# Altium PCB PCB1.PcbDoc (part 5 of 7)
Units mm, origin at the board's own origin, x right, y up, seen from the top; angles counter-clockwise.
Board outline 100 x 70 mm, 6 copper layers (Top Layer 1, GND_1, SIG, VCC, GND_2, Bottom Layer 1), stack 0.816 mm thick; 462 components, 328 nets, 2208 pads, 873 vias.
Unrouted connection lines stored in the file: 175.
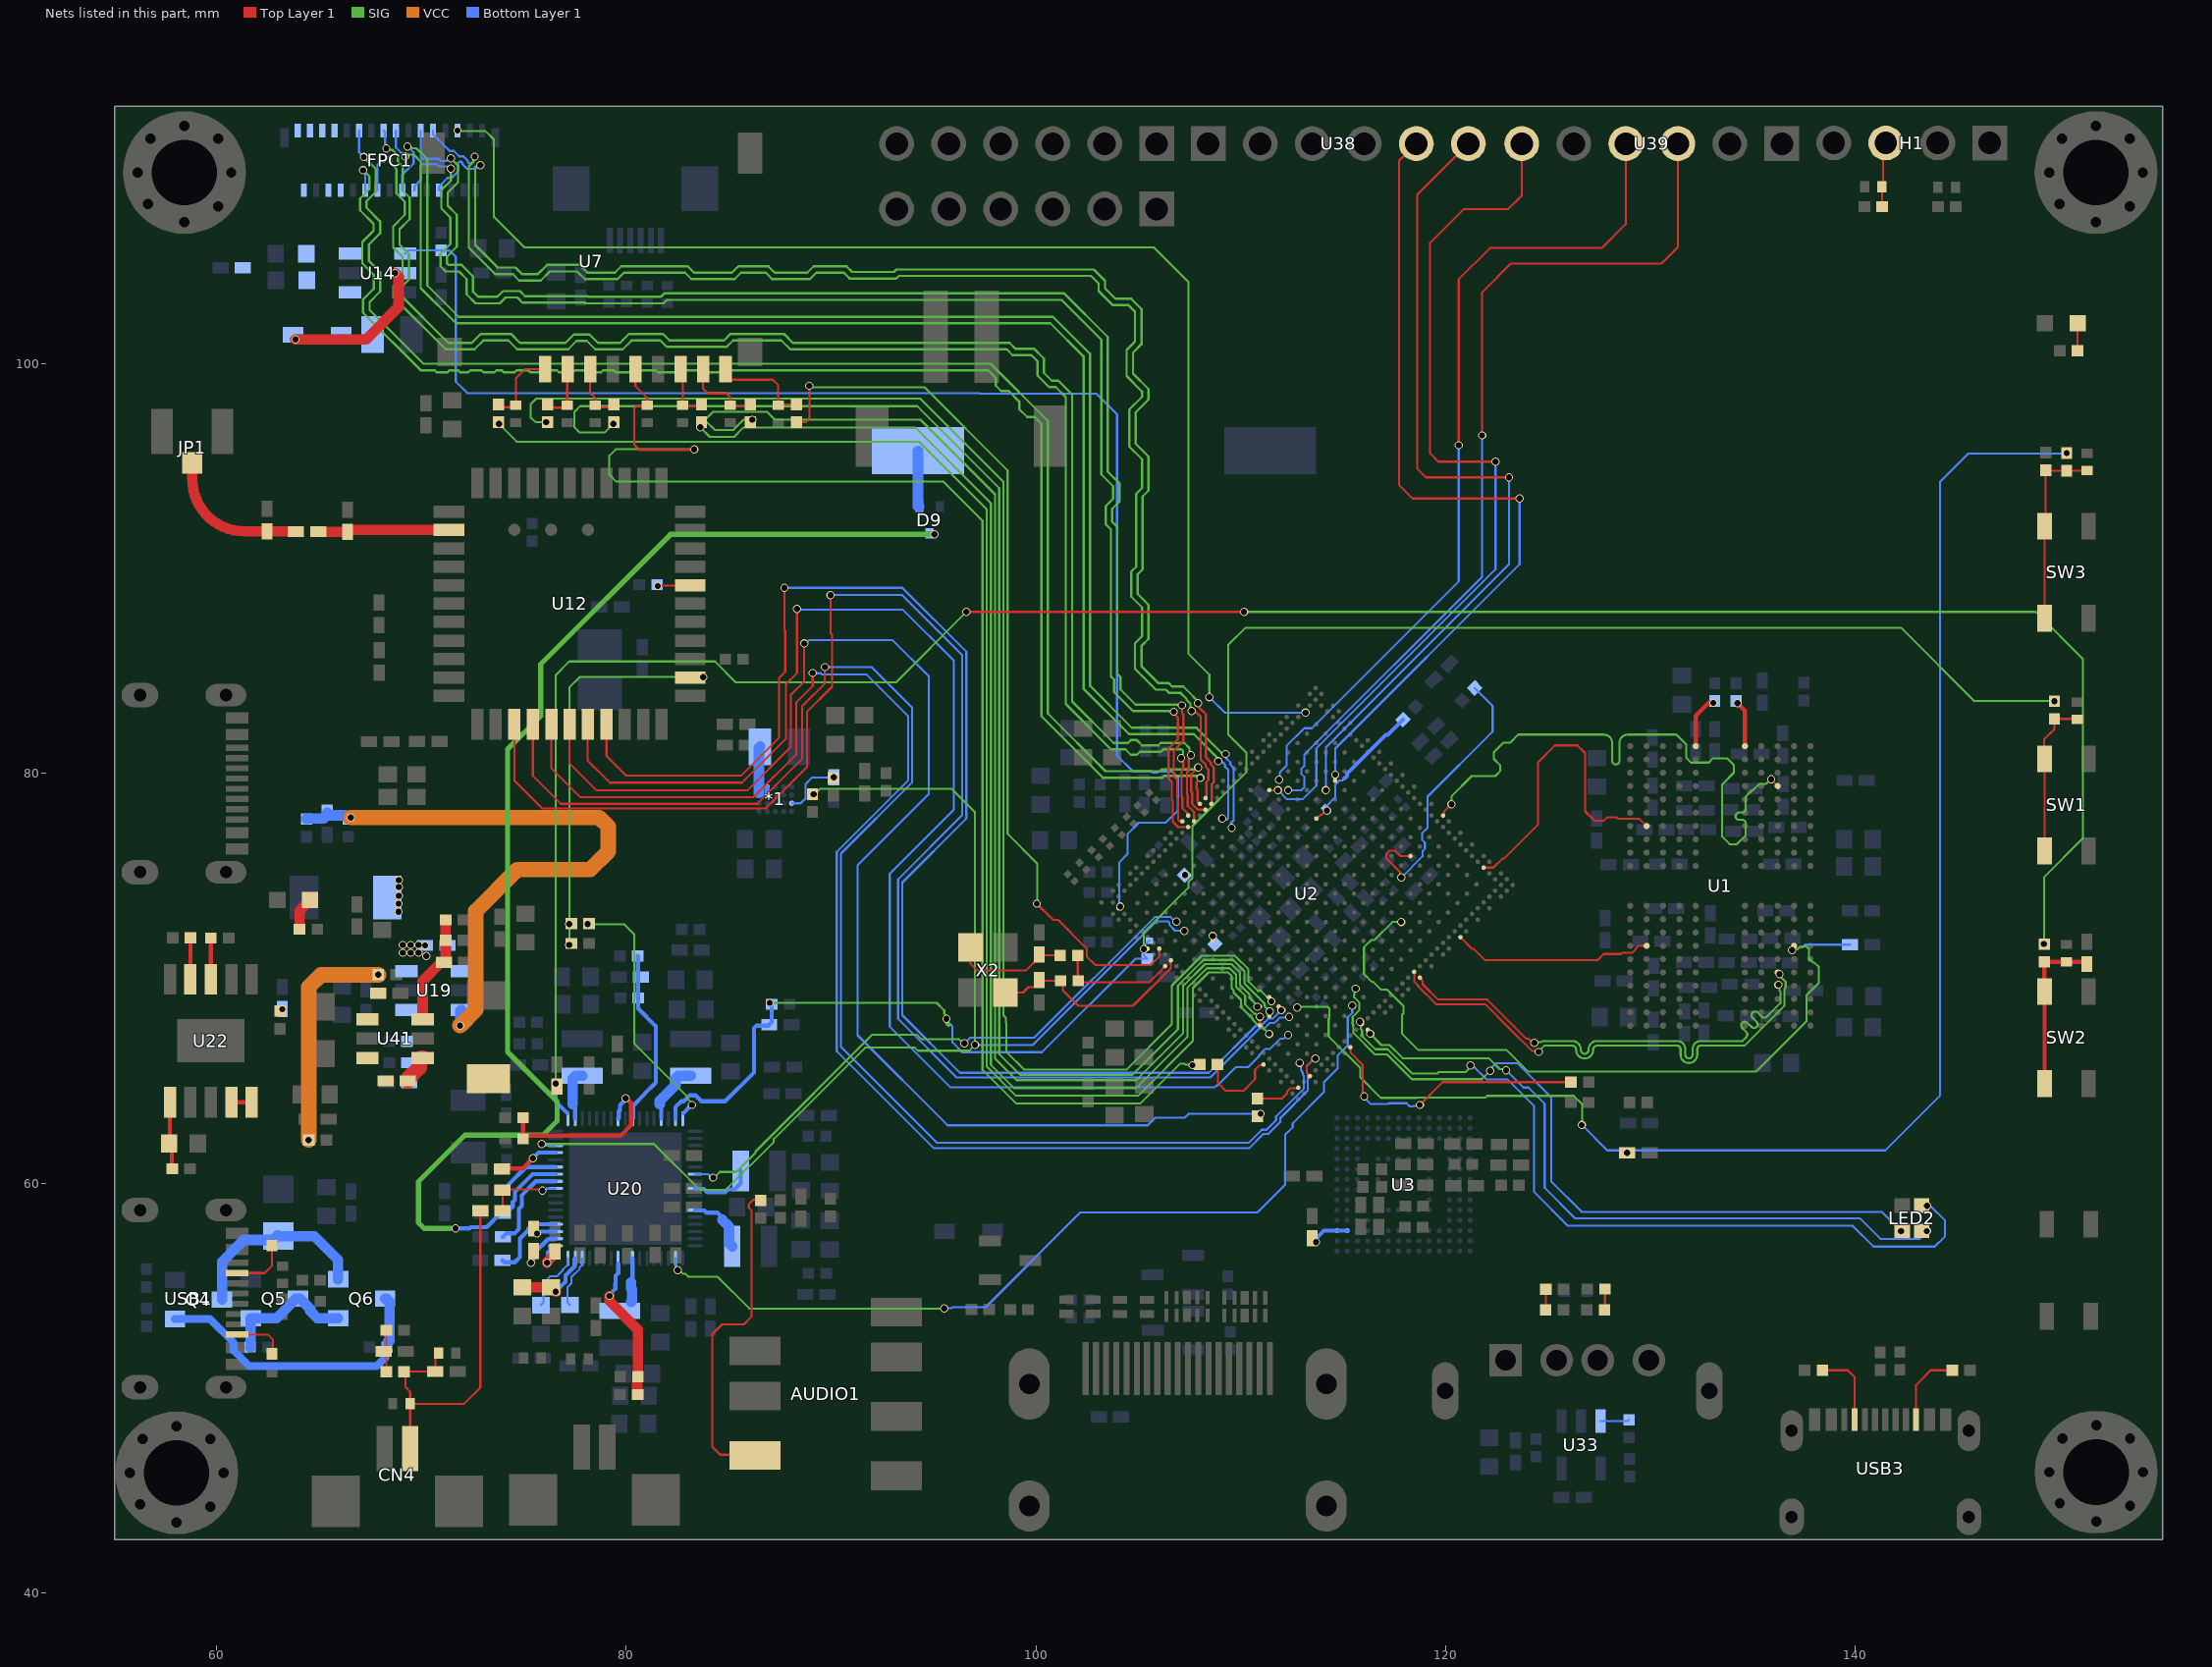
[diagram p9: the nets of this part, all layers, seen from the top]

## Via types
v1: diameter 0.4, hole 0.3, Top Layer 1 to Bottom Layer 1, tented both sides, 873 vias

## Nets (pads, with @x,y where several pads share a name; then routed paths per layer and width w, separated by ;. In a path a pad name is that pad's centre, name@x,y a point inside that pad or via, vN(x,y) a via of type N, cw(c..) or ccw(c..) an arc to the next point about the centre after c; other vN are vias at no path point) (continued)
LPDDR4_DQS1_A_P: U1.D10 U2.N1 | length 30.6
  Top Layer 1 w0.102: U2.N1@119.887,77.948 119.887,77.985 119.946,78.044 119.946,78.154 v1(120.295,78.503) ; v1(135.902,79.72) 135.902,79.714 136.224,79.392 U1.D10@136.224,79.387
  SIG w0.102: v1(120.295,78.503) 120.295,78.885 121.282,79.873 122.434,79.873 122.682,80.121 122.682,80.391 122.361,80.712 122.361,81.041 122.829,81.509 123.165,81.509 123.555,81.899 123.649,81.899 126.987,81.899 127.737,81.899 cw(c127.737,81.492) 128.143,81.492 128.143,80.62 ccw(c128.321,80.62) 128.321,80.442 ccw(c128.321,80.62) 128.499,80.62 128.499,81.492 cw(c128.905,81.492) 128.905,81.899 131.232,81.899 131.277,81.899 131.35,81.825 131.756,81.42 131.756,80.772 131.991,80.537 132.861,80.537 133.071,80.747 133.747,80.747 134.087,80.407 134.087,80.042 133.512,79.467 133.512,76.914 133.877,76.549 134.227,76.549 134.666,76.988 134.666,77.509 134.666,77.559 ccw(c134.488,77.559) 134.488,77.737 134.342,77.737 cw(c134.342,77.915) 134.342,78.093 134.488,78.093 ccw(c134.488,78.271) 134.666,78.271 134.666,78.772 134.666,78.877 134.97,79.181 135.008,79.181 135.312,79.485 135.638,79.485 135.873,79.72 v1(135.902,79.72)
LPDDR4_DQS1_B_N: U1.V10 U2.B17 | length 24.6
  Top Layer 1 w0.102: U2.B17@118.472,70.311 118.472,69.838 118.655,69.655 118.655,69.617 119.539,68.732 121.949,68.732 123.107,67.575 124.222,66.459 124.501,66.459 v1(124.558,66.402)
  SIG w0.102: v1(124.558,66.402) 124.558,66.446 124.823,66.711 125.412,66.711 126.187,66.711 cw(c126.187,66.52) 126.378,66.52 126.378,66.504 ccw(c126.797,66.504) 127.216,66.504 127.216,66.52 cw(c127.406,66.52) 127.406,66.711 128.634,66.711 128.847,66.711 130.556,66.711 131.305,66.711 cw(c131.305,66.533) 131.483,66.533 131.483,66.269 ccw(c131.89,66.269) 131.89,65.862 ccw(c131.89,66.269) 132.296,66.269 132.296,66.533 cw(c132.474,66.533) 132.474,66.711 132.969,66.711 134.123,66.711 134.594,66.711 136.56,68.676 136.56,69.488 136.612,69.54 136.612,69.832 136.313,70.132 v1(136.313,70.207)
LPDDR4_DQS1_B_P: U1.W10 U2.A17 | length 24.7
  Top Layer 1 w0.102: U2.A17@118.755,70.028 118.755,69.996 118.884,69.868 118.884,69.711 119.634,68.961 122.044,68.961 123.335,67.669 123.959,67.046 124.061,67.046 124.255,66.852 v1(124.335,66.852) ; U1.W10@136.224,69.637 136.26,69.673 v1(136.26,69.686)
  SIG w0.102: v1(124.335,66.852) 124.372,66.889 124.688,66.889 124.739,66.94 125.318,66.94 125.412,66.94 126.187,66.94 cw(c126.187,66.52) 126.606,66.52 126.606,66.504 ccw(c126.797,66.504) 126.987,66.504 126.987,66.52 cw(c127.406,66.52) 127.406,66.94 128.634,66.94 128.847,66.94 130.556,66.94 131.305,66.94 cw(c131.305,66.533) 131.712,66.533 131.712,66.269 ccw(c131.89,66.269) 131.89,66.091 ccw(c131.89,66.269) 132.067,66.269 132.067,66.533 cw(c132.474,66.533) 132.474,66.94 132.969,66.94 134.509,66.94 134.656,67.087 134.692,67.123 ccw(c134.566,67.248) 134.692,67.374 134.487,67.579 cw(c134.613,67.704) 134.487,67.83 cw(c134.613,67.704) 134.739,67.83 134.943,67.625 ccw(c135.069,67.751) 135.195,67.625 ccw(c135.069,67.751) 135.195,67.877 134.997,68.075 cw(c135.123,68.2) 134.997,68.326 cw(c135.123,68.2) 135.248,68.326 135.446,68.128 ccw(c135.572,68.254) 135.697,68.128 136.02,68.45 136.357,68.788 136.357,69.361 136.317,69.401 136.317,69.629 v1(136.26,69.686)
LPDDR4_ODT0_CA_A: U1.G2 U2.E2 | length 15.6
  Top Layer 1 w0.102: U2.E2@121.866,75.402 122.334,75.402 122.774,75.842 122.858,75.842 124.523,77.507 124.523,80.548 125.349,81.374 126.454,81.374 126.823,81.005 126.823,78.152 127.274,77.701 127.738,77.701 127.895,77.858 128.36,77.858 128.433,77.784 129.476,77.784 U1.G2@129.824,77.437
LPDDR4_ODT0_CA_B: U1.T2 U2.A10 | length 9.8
  Top Layer 1 w0.102: U2.A10@120.735,72.008 120.735,72.006 121.308,71.433 121.388,71.433 121.942,70.879 127.419,70.879 127.727,71.187 128.558,71.187 128.61,71.239 129.104,71.239 129.451,71.587 U1.T2@129.824,71.587
LPDDR4_RESETN: C149.2 U1.T11 U2.1C7 | length 37
  SIG w0.102: v1(117.836,72.751) 117.41,72.751 116.528,71.869 116.373,71.869 116.019,71.515 116.019,70.214 116.406,69.827 116.473,69.827 116.861,69.44 117.159,69.44 117.944,68.654 117.944,68.277 117.885,68.218 117.885,67.281 118.663,66.503 122.981,66.503 124.047,65.437 135.16,65.437 137.63,67.907 137.63,69.168 138.228,69.766 138.228,70.554 138.022,70.761 137.951,70.761 137.753,70.958 137.753,71.425 137.62,71.558 137.473,71.558 137.445,71.53 137.3,71.53 137.204,71.434 136.98,71.434 v1(136.923,71.377)
  Bottom Layer 1 w0.102: v1(136.923,71.377) 136.98,71.434 137.204,71.434 137.296,71.526 137.441,71.526 137.558,71.642 C149.2@139.753,71.642
MIC1P: C116.2 C253.2 CN4.2 R124.1 U25.2 U26.2 | length 18.8
  Top Layer 1 w0.102: CN4.2@69.45,47.026 69.445,47.031 U26.2@69.445,49.222 ; U25.2@70.828,51.703 70.678,51.553 C253.2@70.678,50.798 69.157,50.798 R124.1@69.14,50.781 69.215,50.706 69.215,50.038 69.445,49.808 U26.2@69.445,49.222 ; C116.2@72.869,58.653 72.869,50.009 72.082,49.222 U26.2@69.445,49.222
MIPI_DSI_0_N: FPC1.21 U2.AR24 | length 70.6
  Top Layer 1 w0.109: v1(107.122,83.33) 107.136,83.316 107.136,82.966 107.201,82.9 107.201,81.572 106.737,81.108 106.737,79.861 106.902,79.696 106.902,78.803 106.945,78.76 106.945,77.753 107.01,77.688 107.134,77.688 U2.AR24@107.155,77.667
  SIG w0.112: v1(71.427,110.046) 71.431,110.046 71.785,109.692 71.785,108.869 71.279,108.363 71.279,107.728 71.72,107.287 71.72,105.727 71.248,105.254 71.248,104.901 71.313,104.836 71.963,104.836 72.517,104.282 72.517,103.531 72.771,103.277 73.686,103.277 73.97,103.561 74.806,103.561 75.055,103.312 78.108,103.312 78.144,103.277 81.687,103.277 81.855,103.445 101.383,103.445 103.51,101.318 103.51,94.737 104.088,94.159 104.088,93.293 103.728,92.933 103.728,92.298 103.978,92.047 103.978,84.871 104.135,84.714 104.135,84.105 104.878,83.362 106.335,83.362 106.344,83.371 107.081,83.371 v1(107.122,83.33)
  Bottom Layer 1 w0.109: FPC1.21@69.954,111.398 69.954,110.085 70.026,110.013 70.845,110.013 70.95,109.908 71.211,109.908 71.349,110.046 v1(71.427,110.046)
MIPI_DSI_0_P: FPC1.20 U2.AP24 | length 70.5
  Top Layer 1 w0.109: v1(106.733,83.014) 106.733,82.935 106.939,82.728 106.939,81.68 106.475,81.216 106.475,79.752 106.64,79.588 106.64,78.695 106.683,78.652 106.683,77.645 106.944,77.384 U2.AP24@107.438,77.384
  SIG w0.112: v1(71.427,109.544) 71.44,109.532 71.44,108.969 70.964,108.494 70.964,107.598 71.405,107.157 71.405,105.857 70.933,105.385 70.933,104.771 71.183,104.521 71.832,104.521 72.202,104.151 72.202,103.4 72.641,102.962 73.816,102.962 74.1,103.246 74.676,103.246 74.925,102.997 77.978,102.997 78.013,102.962 81.817,102.962 81.986,103.13 101.253,103.13 103.195,101.188 103.195,94.606 103.773,94.028 103.773,93.424 103.413,93.063 103.413,92.167 103.663,91.917 103.663,84.74 103.82,84.584 103.82,83.975 104.747,83.047 106.699,83.047 v1(106.733,83.014)
  Bottom Layer 1 w0.109: FPC1.20@69.654,108.492 69.654,108.667 69.962,108.974 69.962,109.688 70.026,109.752 70.736,109.752 70.842,109.646 71.247,109.646 71.349,109.544 v1(71.427,109.544)
MIPI_DSI_1_N: FPC1.15 U2.AP23 | length 71.5
  Top Layer 1 w0.109: v1(107.573,80.897) 107.573,80.818 107.46,80.704 107.46,80.128 107.374,80.042 107.374,78.999 107.417,78.956 107.417,78.427 107.721,78.124 U2.AP23@107.721,77.667
  SIG w0.112: v1(68.282,110.521) 68.337,110.466 68.472,110.466 68.491,110.447 68.589,110.447 68.839,110.197 68.839,109.903 69.088,109.654 69.088,108.458 69.42,108.126 69.42,107.074 68.93,106.584 68.93,105.822 69.386,105.366 69.386,104.12 68.93,103.663 68.93,103.409 71.308,101.031 72.456,101.031 72.893,101.468 74.364,101.468 74.801,101.031 77.028,101.031 77.435,101.438 78.204,101.438 78.611,101.031 79.695,101.031 80.132,101.468 81.791,101.468 82.106,101.153 84.77,101.153 85.085,101.468 87.699,101.468 88.136,101.031 98.71,101.031 98.991,100.749 99.905,100.749 100.391,100.264 100.391,99.568 100.772,99.187 101.095,99.187 101.769,98.513 101.769,83.524 103.799,81.494 104.497,81.494 104.634,81.631 104.93,81.631 105.186,81.376 105.98,81.376 106.094,81.49 107.249,81.49 107.499,81.24 107.499,81.106 107.518,81.087 107.518,80.952 v1(107.573,80.897)
  Bottom Layer 1 w0.109: FPC1.15@68.154,111.398 68.226,111.326 68.226,110.577 v1(68.282,110.521)
MIPI_DSI_1_P: FPC1.14 U2.AR23 | length 71.7
  Top Layer 1 w0.109: v1(107.093,80.752) 107.093,80.673 107.198,80.568 107.198,80.236 107.112,80.151 107.112,78.89 107.156,78.847 107.156,78.319 107.417,78.058 107.417,77.971 U2.AR23@107.438,77.95
  SIG w0.112: v1(68.141,110.04) 68.196,110.095 68.329,110.095 68.366,110.132 68.458,110.132 68.524,110.066 68.524,109.772 68.773,109.523 68.773,108.328 69.183,107.918 69.183,107.283 68.615,106.715 68.615,105.692 69.072,105.235 69.072,104.251 68.615,103.794 68.615,103.279 71.178,100.716 72.586,100.716 73.023,101.153 74.234,101.153 74.671,100.716 77.158,100.716 77.566,101.123 78.074,101.123 78.481,100.716 79.825,100.716 80.262,101.153 81.661,101.153 81.976,100.838 84.9,100.838 85.215,101.153 87.569,101.153 88.006,100.716 98.579,100.716 98.861,100.434 99.775,100.434 100.076,100.133 100.076,99.438 100.642,98.872 100.965,98.872 101.454,98.383 101.454,83.393 103.668,81.18 104.371,81.18 104.634,80.916 104.93,80.916 105.075,81.061 106.111,81.061 106.224,81.175 107.119,81.175 107.184,81.109 107.184,80.921 107.093,80.83 v1(107.093,80.752)
  Bottom Layer 1 w0.109: FPC1.14@67.854,108.492 67.854,109.735 68.141,110.022 v1(68.141,110.04)
MIPI_DSI_2_N: FPC1.12 U2.AR21 | length 70.7
  Top Layer 1 w0.109: U2.AR21@108.004,78.515 108.004,78.521 107.89,78.635 107.89,79.191 107.846,79.234 107.846,79.575 108.031,79.76 v1(108.031,79.785)
  SIG w0.112: v1(67.147,109.46) 67.157,109.46 67.452,109.166 67.452,108.537 66.995,108.08 66.995,107.503 67.659,106.839 67.659,106.508 67.11,105.959 67.11,104.913 67.67,104.352 67.67,103.675 67.147,103.153 67.147,102.51 69.963,99.695 70.637,99.695 70.739,99.593 71.272,99.593 71.374,99.695 71.78,99.695 71.882,99.593 72.288,99.593 72.39,99.695 72.923,99.695 73.025,99.593 73.558,99.593 73.66,99.695 73.914,99.695 74.016,99.593 74.549,99.593 74.651,99.695 75.209,99.695 75.311,99.593 75.844,99.593 75.946,99.695 76.606,99.695 76.708,99.593 77.368,99.593 77.47,99.695 78.003,99.695 78.105,99.593 78.765,99.593 78.867,99.695 79.375,99.695 79.477,99.593 80.162,99.593 80.264,99.695 81.432,99.695 81.534,99.593 82.448,99.593 82.55,99.695 83.439,99.695 83.541,99.593 84.607,99.593 84.709,99.695 97.663,99.695 98.044,99.314 98.044,98.94 98.305,98.679 98.679,98.679 99.187,98.171 99.187,97.797 99.575,97.409 99.949,97.409 100.269,97.089 100.269,82.801 103.272,79.798 106.175,79.798 106.261,79.884 107.854,79.884 107.953,79.785 v1(108.031,79.785)
  Bottom Layer 1 w0.109: v1(67.147,109.46) 67.147,109.431 67.254,109.324 FPC1.12@67.254,108.492
MIPI_DSI_2_P: FPC1.11 U2.AP21 | length 71.2
  Top Layer 1 w0.109: v1(107.925,80.298) 107.925,80.296 107.585,79.955 107.585,79.126 107.628,79.082 107.628,78.515 107.91,78.233 U2.AP21@108.287,78.233
  SIG w0.112: v1(67.183,110.109) 67.767,109.525 67.767,108.407 67.31,107.95 67.31,107.633 67.974,106.97 67.974,106.378 67.425,105.828 67.425,105.043 67.985,104.483 67.985,103.545 67.462,103.022 67.462,102.641 70.093,100.01 97.793,100.01 100.584,97.219 100.584,82.931 103.402,80.113 106.044,80.113 106.131,80.199 107.748,80.199 107.847,80.298 v1(107.925,80.298)
  Bottom Layer 1 w0.109: FPC1.11@66.954,111.398 66.954,110.338 v1(67.183,110.109)
MIPI_DSI_3_N: FPC1.24 U2.AP20 | length 70.4
  Top Layer 1 w0.109: v1(107.918,83.437) 107.973,83.381 107.973,83.214 108.308,82.879 108.308,80.789 108.547,80.551 108.547,80.452 108.687,80.311 108.687,79.575 108.586,79.474 108.586,78.532 U2.AP20@108.569,78.515
  SIG w0.112: v1(72.866,109.703) 72.809,109.703 72.624,109.519 72.624,105.811 73.726,104.709 74.584,104.709 74.899,104.394 75.692,104.394 76.134,104.836 77.727,104.836 78.103,104.46 79.441,104.46 79.751,104.77 83,104.77 83.31,104.46 85.156,104.46 85.466,104.77 86.937,104.77 87.247,104.46 88.839,104.46 89.149,104.77 90.747,104.77 91.026,104.491 93.061,104.491 93.187,104.617 102.819,104.617 103.378,104.058 103.378,103.693 103.886,103.185 104.651,103.185 105.156,102.68 105.156,100.965 104.744,100.553 104.744,99.537 105.499,98.781 105.499,98.267 104.871,97.638 104.871,96.108 105.499,95.479 105.499,93.815 105.211,93.527 105.211,89.971 104.974,89.734 104.974,88.765 105.499,88.24 105.499,86.576 105.156,86.233 105.156,85.245 105.989,84.412 106.485,84.412 106.651,84.246 107.203,84.246 107.705,83.745 107.705,83.728 107.918,83.515 v1(107.918,83.437)
  Bottom Layer 1 w0.109: FPC1.24@70.854,108.492 70.854,108.667 71.267,109.079 71.467,109.079 71.784,109.397 71.784,109.812 71.848,109.876 71.938,109.876 72.002,109.812 72.002,109.757 72.227,109.533 72.534,109.533 72.649,109.648 72.81,109.648 v1(72.866,109.703)
MIPI_DSI_3_P: FPC1.23 U2.AR20 | length 70.5
  Top Layer 1 w0.109: v1(107.602,83.047) 107.657,82.992 107.825,82.992 108.046,82.771 108.046,80.681 108.285,80.442 108.285,80.343 108.425,80.203 108.425,79.684 108.324,79.582 108.324,78.914 108.308,78.898 108.308,78.819 U2.AR20@108.287,78.798
  SIG w0.112: v1(72.597,110.127) 72.542,110.072 72.542,109.882 72.309,109.649 72.309,105.681 73.596,104.394 74.453,104.394 74.768,104.079 75.822,104.079 76.264,104.521 77.597,104.521 77.973,104.145 79.571,104.145 79.881,104.455 82.87,104.455 83.18,104.145 85.286,104.145 85.596,104.455 86.807,104.455 87.117,104.145 88.969,104.145 89.279,104.455 90.617,104.455 90.896,104.176 93.191,104.176 93.317,104.302 102.689,104.302 103.063,103.927 103.063,103.563 103.756,102.87 104.521,102.87 104.841,102.55 104.841,101.095 104.429,100.683 104.429,99.406 105.184,98.651 105.184,98.397 104.556,97.769 104.556,95.977 105.184,95.349 105.184,93.946 104.896,93.657 104.896,90.101 104.659,89.865 104.659,88.635 105.184,88.11 105.184,86.707 104.841,86.363 104.841,85.114 105.859,84.097 106.355,84.097 106.52,83.931 107.073,83.931 107.356,83.649 107.356,83.602 107.547,83.411 107.547,83.103 v1(107.602,83.047)
  Bottom Layer 1 w0.109: FPC1.23@70.554,111.398 70.554,111.223 71.375,110.402 71.575,110.402 71.839,110.138 72.047,110.138 72.264,109.921 72.264,109.866 72.335,109.794 72.426,109.794 72.541,109.91 72.541,110.071 v1(72.597,110.127)
MIPI_DSI_CLK_N: FPC1.18 U2.1U11 | length 71.7
  SIG w0.112: v1(69.309,110.621) 69.364,110.566 69.488,110.566 69.519,110.535 69.749,110.535 70.278,110.007 70.278,103.839 71.816,102.301 100.836,102.301 102.641,100.497 102.641,84.28 104.68,82.24 107.839,82.24 109.071,81.009 109.203,81.009 v1(109.258,80.954)
  Bottom Layer 1 w0.109: FPC1.18@69.054,108.492 69.054,109.242 69.61,109.797 69.61,110.33 69.319,110.621 v1(69.309,110.621) ; v1(109.258,80.954) 109.313,80.898 109.313,80.728 109.501,80.54 109.501,80.434 109.652,80.283 109.652,77.716 109.511,77.575 109.511,77.485 109.531,77.465 109.531,77.376 v1(109.559,77.348)
MIPI_DSI_CLK_P: FPC1.17 U2.1V11 | length 70.1
  SIG w0.112: v1(69.196,110.132) 69.274,110.132 69.363,110.221 69.619,110.221 69.963,109.876 69.963,103.709 71.686,101.986 100.706,101.986 102.326,100.366 102.326,84.149 104.55,81.925 107.709,81.925 108.848,80.786 108.848,80.654 v1(108.903,80.599)
  Bottom Layer 1 w0.109: FPC1.17@68.754,111.398 68.754,110.574 v1(69.196,110.132) ; v1(108.903,80.599) 108.959,80.543 109.128,80.543 109.24,80.432 109.24,80.325 109.39,80.175 109.39,77.824 109.326,77.76 109.236,77.76 109.216,77.78 109.127,77.78 v1(109.1,77.808)
MIPI_DSI_RESET: FPC1.27 U2.AP4 | length 66.7
  SIG w0.102: v1@71.755,111.379 73.12,111.379 73.533,110.966 73.533,107.188 75.03,105.691 105.764,105.691 107.442,104.013 107.442,85.852 108.468,84.826 v1(108.468,83.73)
  Bottom Layer 1 w0.102: v1(108.468,83.73) 109.226,82.972 v1(113.164,82.972)
  other v1: 71.754,111.398
MIPI_DSI_VCC_LED+: C55.2 D8.1 FPC1.1 FPC1.2 FPC1.3 U14.5 | length 7.4
  Top Layer 1 w0.508: v1(63.844,101.204) 67.295,101.204 68.88,102.789 68.88,104.274 v1(68.714,104.44)
MIPI_DSI_VCC_LED-: FPC1.5 FPC1.6 FPC1.7 FPC1.8 R31.2 R32.2 U14.3
Net*1_A2: *1.A2 C124.2 R57.1 | length 3
  Bottom Layer 1 w0.102: *1.A2@88.076,78.549 88.078,78.547 88.515,78.547 88.751,78.783 88.751,79.48 89.083,79.812 v1(90.127,79.812)
Net*1_D3: *1.D3 *1.D4 *1.E3 *1.E4 U21.1 | length 3.1
  Bottom Layer 1 w0.203: *1.E3@86.476,79.05 86.565,78.961 86.864,78.961 *1.D3@86.876,78.949 *1.D4@86.876,79.349
  Bottom Layer 1 w0.508: *1.E3@86.476,79.05 *1.E4@86.476,79.349 86.476,81.26 U21.1@86.529,81.312
NetAUDIO1_6: AUDIO1.6 R96.2 | length 16.3
  Top Layer 1 w0.102: AUDIO1.6@86.291,46.701 86.256,46.736 84.582,46.736 84.201,47.117 84.201,52.621 84.678,53.098 85.737,53.098 86.111,53.472 86.111,58.666 85.985,58.793 85.985,58.975 86.201,59.191 86.508,59.191 86.519,59.202 R96.2@86.564,59.156
NetBT1_1: BT1.1 D9.1 | length 2.8
  Bottom Layer 1 w0.508: BT1.1@94.243,95.758 94.243,93.041 94.25,93.035 D9.1@94.303,93.035
NetC43_1: C43.1 C45.1 JP1.1 | length 7.6
  Top Layer 1 w0.508: JP1.1@58.807,95.454 58.807,94.368 ccw(c61.347,94.368) 61.347,91.828 C43.1@62.461,91.828 62.469,91.82 63.862,91.82 C45.1@63.869,91.813
NetC44_1: C44.1 C45.2 U12.2 | length 6.5
  Top Layer 1 w0.508: C45.2@64.959,91.813 65.084,91.813 65.104,91.793 C44.1@66.392,91.793 66.392,91.885 66.408,91.901 U12.2@71.34,91.901
NetC61_2: C61.2 R37.1 U2.AD37 X2.3 | length 10.3
  Top Layer 1 w0.102: X2.3@98.514,69.305 99.374,69.305 99.634,69.565 99.945,69.565 100.164,69.784 C61.2@100.164,69.909 100.193,69.88 R37.1@101.205,69.88 101.318,69.766 101.318,69.399 102.063,68.654 104.742,68.654 106.593,70.506 U2.AD37@106.593,70.877
NetC62_2: C62.2 R36.1 X2.1 | length 5.7
  Top Layer 1 w0.102: X2.1@96.814,71.505 96.814,70.699 97.121,70.392 99.524,70.392 100.164,71.032 C62.2@100.164,71.157 100.201,71.12 R36.1@101.18,71.12
NetC63_1: C63.1 U19.1
NetC63_2: C63.2 L2.1 U19.6
  other v1: 70.235,71.086 69.088,71.247 69.469,71.247 69.85,71.247 70.171,71.605 69.088,71.628 69.469,71.628 69.85,71.628 68.881,73.244 68.875,73.643 68.887,74.024 68.892,74.453 68.898,74.799
NetC64_1: C64.1 R39.1 R43.2 U19.3 | length 30.7
  VCC w0.762: v1(66.548,77.851) 78.675,77.851 79.121,77.405 79.121,76.2 78.232,75.311 74.676,75.311 72.644,73.279 72.644,68.453 v1(71.882,67.691)
  Bottom Layer 1 w0.508: R39.1@64.389,77.776 64.389,77.789 64.405,77.805 65.225,77.805 C64.1@65.395,77.974 ; C64.1@65.395,78.099 C64.1@65.395,77.974 ; R43.2@66.427,77.784 66.427,77.797 66.266,77.958 65.411,77.958 C64.1@65.395,77.974 ; v1(71.882,67.691) 71.882,68.412 71.928,68.458 U19.3@71.968,68.458
NetC69_2: C69.2 R41.2 R42.2 U19.4
NetC95_1: C95.1 U20.48 | length 3
  Top Layer 1 w0.203: C95.1@73.924,60.685 73.945,60.706 74.93,60.706 v1(75.438,61.214)
  Bottom Layer 1 w0.203: v1(75.438,61.214) 75.708,61.484 U20.48@76.545,61.484
NetC98_2: C98.2 D9.3 U20.45 | length 64.1
  SIG w0.254: v1(71.657,57.785) 70.126,57.785 69.85,58.061 69.85,60.071 72.117,62.338 75.927,62.338 76.624,63.035 76.624,63.981 74.203,66.402 74.203,81.188 75.819,82.804 75.819,85.344 82.151,91.676 v1(95.04,91.676)
  Bottom Layer 1 w0.203: v1(71.657,57.785) 72.339,57.785 72.402,57.848 73.185,57.848 73.851,58.513 74.101,58.513 74.452,58.864 74.452,59.067 74.556,59.172 74.556,59.57 75.42,60.434 U20.45@76.545,60.434
NetC99_1: C99.1 U20.44 | length 4.6
  Bottom Layer 1 w0.203: C99.1@73.971,57.375 74.139,57.542 74.536,57.542 74.756,57.763 74.756,58.744 74.892,58.879 74.892,59.398 75.578,60.084 U20.44@76.545,60.084
NetC100_2: C100.2 R52.1 R53.2 U20.61 | length 8.8
  Bottom Layer 1 w0.203: U20.61@80.302,63.141 80.329,63.168 80.329,63.774 80.87,64.315 80.87,64.334 81.44,64.904 81.44,67.658 80.575,68.523 R53.2@80.575,69.035 80.568,69.043 80.568,70.062 80.568,71.078 R52.1@80.56,71.086
NetC103_2: C103.2 U20.38 | length 4
  Bottom Layer 1 w0.203: C103.2@73.95,56.225 74.041,56.134 74.549,56.134 74.803,56.388 74.803,57.28 75.218,57.695 75.218,57.771 75.43,57.984 U20.38@76.545,57.984
NetC104_2: C104.2 U20.46 | length 3.1
  Bottom Layer 1 w0.203: C104.2@73.956,59.642 74.081,59.642 74.249,59.81 74.249,59.935 75.098,60.784 U20.46@76.545,60.784
NetC109_1: C109.1 U20.36 | length 2.5
  Top Layer 1 w0.203: v1(75.344,56.112) 75.381,56.15 75.381,56.594 C109.1@75.471,56.684
  Bottom Layer 1 w0.203: v1(75.344,56.112) 75.344,56.165 75.495,56.316 75.495,56.572 76.18,57.257 76.518,57.257 U20.36@76.545,57.284
NetC109_2: C109.2 U20.37 | length 0.9
  Bottom Layer 1 w0.203: v1(75.64,57.531) 75.72,57.531 75.823,57.634 U20.37@76.545,57.634
NetC111_1: C111.1 U20.35 | length 1.8
  Top Layer 1 w0.508: v1(76.137,56.112) 76.137,56.156 76.515,56.534 C111.1@76.515,56.659
  Bottom Layer 1 w0.203: v1(76.137,56.112) 76.174,56.15 76.174,56.289 76.179,56.294 76.179,56.614 76.29,56.725 76.29,56.907 76.317,56.934 U20.35@76.545,56.934
NetC112_2: C112.2 L10.2 U20.33 | length 3.8
  Top Layer 1 w0.508: L10.2@74.926,54.908 C112.2@76.323,54.908 76.373,54.908 76.555,54.726 v1(76.555,54.699)
  Bottom Layer 1 w0.203: v1(76.555,54.699) 77.034,55.178 77.034,55.482 77.476,55.924 77.476,56.3 U20.33@77.502,56.327
NetC116_1: C116.1 C117.2 U20.43 | length 3.7
  Top Layer 1 w0.102: C116.1@73.959,58.653 C117.2@73.959,59.654 73.995,59.69 75.843,59.69 v1(75.902,59.631)
  Bottom Layer 1 w0.102: v1(75.902,59.631) 76.01,59.631 76.104,59.725 76.536,59.725 U20.43@76.545,59.734
NetC158_2: C158.2 U3.C1 U3.C2 | length 1.7
  Bottom Layer 1 w0.203: v1@113.7,57.279 113.758,57.338 113.758,57.37 114.067,57.679 U3.C1@114.704,57.679 U3.C2@115.204,57.679
  other v1: 113.678,57.119
NetC233_2: C233.2 R104.2 SW2.1 SW2.2 U36.2 | length 8.1
  Top Layer 1 w0.203: SW2.1@149.259,64.858 SW2.2@149.259,69.358 149.246,69.37 R104.2@149.246,70.802 151.209,70.802 C233.2@151.316,70.695
NetC239_2: C239.2 R108.2 U2.1N5 U2.1N6 | length 7.1
  Top Layer 1 w0.102: U2.1N6@113.699,77.806 113.726,77.806 113.897,77.978 113.931,77.978 114.121,78.168 114.202,78.168 114.202,78.19 114.155,78.236 U2.1N5@114.155,78.268 114.182,78.241 114.181,78.24 114.181,78.216 v1(114.215,78.182)
  Bottom Layer 1 w0.102: v1(114.215,78.182) 114.215,78.216 C239.2@114.139,78.291 114.139,78.359 114.614,78.834 114.614,79.447 114.82,79.653 114.959,79.653 115.062,79.756
  Bottom Layer 1 w0.203: 115.062,79.756 115.189,79.883 115.189,80 117.081,81.892 117.182,81.892 R108.2@117.926,82.636
NetC240_1: C240.1 U41.1 | length 1.6
  Top Layer 1 w0.102: C240.1@69.332,64.985 C240.1@69.457,64.985
  Top Layer 1 w0.762: C240.1@69.332,64.985 69.332,65.082 69.888,65.638 69.888,66.025 69.969,66.106 U41.1@70.057,66.106
NetC240_2: C240.2 L11.1 U41.6
NetC241_1: C241.1 R109.1 R113.2 U41.3 | length 5.4
  Top Layer 1 w0.508: U41.3@70.057,68.006 70.057,69.874 70.962,70.779 71.164,70.779 71.18,70.795 R109.1@71.18,71.856 ; R109.1@71.18,71.856 R113.2@71.179,72.848
NetC246_2: C246.2 R110.2 R112.2 U41.4 | length 11.1
  VCC w0.762: v1(64.487,62.105) 64.487,69.567 65.096,70.176 v1(67.888,70.176)
NetC247_2: C247.2 R111.1
  other v1: 63.201,68.49
NetC251_2: C251.2 R119.1 U22.1 | length 3.5
  Top Layer 1 w0.203: U22.1@57.712,63.95 57.712,61.969 C251.2@57.672,61.93 57.811,61.791 R119.1@57.811,60.667 ; R119.1@57.812,60.707 R119.1@57.825,60.694 ; R119.1@57.935,60.804 R119.1@58.003,60.736
NetC252_2: C252.2 R123.2 R124.2 | length 2.1
  Top Layer 1 w0.102: R124.2@68.274,50.781 68.274,51.659 C252.2@68.148,51.786 68.281,51.919 R123.2@68.281,52.815
NetD8_2: D8.2 U13.2 U14.1
NetF1_1: F1.1 Q4.3 Q6.2 | length 9.4
  Bottom Layer 1 w0.508: Q4.3@60.258,54.317 60.258,56.155 61.323,57.22 62.747,57.22 F1.1@62.972,57.445 ; F1.1@63.006,57.411 64.763,57.411 65.924,56.25 Q6.2@65.924,55.305
NetL3_1: L3.1 U20.65 | length 3.1
  Bottom Layer 1 w0.203: 81.632,63.847 81.632,63.837 81.702,63.767 U20.65@81.702,63.141
  Bottom Layer 1 w0.508: 81.632,63.847 81.632,64.018 82.399,64.785 82.399,65.095 82.545,65.241 L3.1@83.145,65.241
NetL4_2: L4.2 U20.9 | length 3.1
  Bottom Layer 1 w0.203: U20.9@83.36,59.734 83.384,59.71 83.793,59.71 83.948,59.555 84.816,59.555 84.955,59.694 85.29,59.694 85.588,59.993 L4.2@85.588,60.593
NetL5_2: L5.2 U20.12 | length 3.1
  Bottom Layer 1 w0.203: U20.12@83.36,58.684 83.386,58.657 83.812,58.657 83.922,58.548 84.454,58.548 84.592,58.41 84.592,58.322 84.692,58.222
  Bottom Layer 1 w0.508: 84.692,58.222 84.692,58.197 85.022,57.867 85.022,57.053 L5.2@85.168,56.907
NetL6_1: L6.1 U20.53 | length 2.5
  Bottom Layer 1 w0.203: 77.378,63.849 77.383,63.849 77.502,63.73 U20.53@77.502,63.141
  Bottom Layer 1 w0.508: 77.378,63.849 77.378,65.1 77.524,65.246 L6.1@77.85,65.246
NetL7_2: L7.2 U20.25 | length 2.2
  Bottom Layer 1 w0.203: 80.237,55.152 80.302,55.217 U20.25@80.302,56.327
  Bottom Layer 1 w0.508: 80.227,54.181 80.282,54.236 80.282,54.81 80.237,54.855 80.237,55.152
NetL8_2: L8.2 U20.32 | length 2.6
  Bottom Layer 1 w0.102: L8.2@77.248,54.041 77.129,54.16 77.129,54.913 77.316,55.101 77.316,55.405 77.73,55.818 77.73,55.896 77.852,56.019 U20.32@77.852,56.327
NetL9_2: L9.2 U20.34 | length 3
  Bottom Layer 1 w0.102: L9.2@75.829,54.034 75.946,54.152 75.946,55.115 76.274,55.443 76.6,55.443 76.89,55.733 76.89,55.77 77.136,56.016 77.136,56.311 U20.34@77.152,56.327
NetLED1_2: LED1.2 R40.1 | length 1.6
  Top Layer 1 w0.508: R40.1@64.045,72.4 64.045,73.305 LED1.2@64.558,73.819
NetLED3_2: LED3.2 R117.2 | length 1.3
  Top Layer 1 w0.102: R117.2@150.871,100.642 LED3.2@150.87,101.984
NetQ4_1: Q4.1 Q6.3 R74.2 | length 14.7
  Bottom Layer 1 w0.381: Q4.1@57.958,53.367 59.663,53.367 60.833,52.197 60.833,51.816 61.595,51.054 67.803,51.054 68.026,51.277 68.228,51.479 68.228,51.911 68.308,51.99 R74.2@68.317,51.99
  Bottom Layer 1 w0.508: Q6.3@68.224,54.355 68.283,54.355 68.429,54.209 68.429,52.296 68.345,52.212 68.345,52.006 68.329,51.99 R74.2@68.317,51.99
NetQ5_1: Q5.1 Q5.3 Q6.1 R73.2 | length 6.5
  Bottom Layer 1 w0.508: R73.2@61.632,51.999 61.643,51.999 61.659,52.015 Q5.1@61.659,53.405 62.921,53.405 63.713,54.197 63.713,54.209 63.859,54.355 Q5.3@63.959,54.355 64.059,54.355 64.565,53.85 64.565,53.75 64.91,53.405 Q6.1@65.924,53.405
NetR1_2: R1.2 U6.1 U7.7 | length 2.8
  Top Layer 1 w0.102: U7.7@82.646,99.743 82.754,99.635 82.754,97.884 82.804,97.934 R1.2@83.673,97.934
NetR2_2: R2.2 U5.1 U7.8 | length 3.9
  Top Layer 1 w0.102: U7.8@83.746,99.743 83.746,98.795 83.98,98.561 84.895,98.561 84.955,98.501 84.955,98.491 85.079,98.367 85.079,97.926 86.05,97.926 R2.2@86.056,97.932
NetR3_2: R3.2 U4.1 U7.1 | length 3.9
  Top Layer 1 w0.102: R3.2@73.759,97.891 74.576,97.891 74.605,97.919 74.605,99.293 75.055,99.743 U7.1@76.046,99.743
NetR4_2: R4.2 U7.2 U10.2 | length 2.8
  Top Layer 1 w0.102: R4.2@76.154,97.867 77.111,97.867 77.112,97.868 77.112,99.709 U7.2@77.146,99.743
NetR5_2: R5.2 U7.3 U9.2 | length 2.9
  Top Layer 1 w0.102: U7.3@78.246,99.743 78.228,99.725 78.228,98.598 78.487,98.338 78.487,97.919 78.533,97.873 R5.2@79.398,97.873
NetR6_2: R6.2 U7.9 U11.2 | length 4.9
  Top Layer 1 w0.102: U7.9@84.846,99.743 84.846,99.482 85.095,99.233 87.148,99.233 87.416,98.964 U11.2@87.416,97.987 87.45,98.02 R6.2@88.315,98.02
NetR8_1: R8.1 U2.B37 | length 2.3
  Top Layer 1 w0.102: R8.1@110.815,64.131 110.819,64.135 112.032,64.135 112.267,64.369 112.267,64.482 112.42,64.635 112.792,64.635 U2.B37@112.812,64.656
NetR9_2: R9.2 U2.A29 | length 13.5
  Top Layer 1 w0.102: U2.A29@115.361,66.634 115.365,66.63 115.365,66.372 115.956,65.781 115.956,64.593 115.958,64.59 115.958,64.308 v1(116.034,64.232) ; v1(118.746,63.816) 119.86,64.93 R9.2@126.131,64.93
  Bottom Layer 1 w0.102: v1(116.034,64.232) 116.034,64.172 116.337,63.869 117.208,63.869 117.236,63.898 118.107,63.898 118.262,63.743 118.39,63.743 118.405,63.759 118.689,63.759 v1(118.746,63.816)
NetR10_1: R10.1 U2.G38 | length 4.1
  Top Layer 1 w0.102: R10.1@108.87,65.789 108.897,65.762 108.897,64.874 109.259,64.513 110.141,64.513 110.698,65.07 110.698,65.527 110.936,65.765 111.092,65.765 U2.G38@111.115,65.787
NetR12_1: R12.1 U12.29 | length 1.6
  Top Layer 1 w0.102: v1(81.534,89.154) 81.563,89.183 U12.29@83.119,89.183
NetR30_2: R30.2 U2.1U16
  other v1: 107.286,75.039
NetR36_2: R36.2 R37.2 U2.AD38 | length 5.9
  Top Layer 1 w0.102: R36.2@102.046,71.12 102.046,69.904 102.151,69.799 105.515,69.799 U2.AD38@106.31,70.594
NetR38_2: R38.2 U2.1M18
  other v1: 108.635,72.065
NetR45_1: R45.1 U20.68 | length 12.6
  SIG w0.102: v1(78.105,72.644) 79.883,72.644 80.391,72.136 80.391,66.802 83.008,64.185 83.008,64.09 83.205,63.892 v1(83.205,63.812)
  Bottom Layer 1 w0.203: U20.68@82.779,63.41 83.181,63.812 v1(83.205,63.812)
NetR49_2: R49.2 R50.1 U20.59 | length 9.2
  Top Layer 1 w0.203: R49.2@74.954,63.186 R50.1@74.953,62.165 75.101,62.313 79.712,62.313 80.232,62.833 80.232,63.905 80.001,64.137 v1(79.969,64.137)
  Bottom Layer 1 w0.203: U20.59@79.602,63.141 79.629,63.168 79.629,63.49 79.68,63.541 79.68,63.6 79.686,63.606 79.686,63.801 79.969,64.084 v1(79.969,64.137)
NetR54_1: R54.1 R55.2 U20.27 | length 7.2
  Top Layer 1 w0.508: v1(79.171,54.486) 79.171,54.236 80.57,52.838 R54.1@80.57,50.546 80.557,50.546 80.541,50.53 80.541,50.517 80.532,50.508 80.532,49.692 80.548,49.676 R55.2@80.556,49.676
  Bottom Layer 1 w0.203: v1(79.171,54.486) 79.171,54.539 79.46,54.827 79.46,55.092 79.475,55.108 79.475,55.468 79.602,55.595 U20.27@79.602,56.058
NetR61_1: R61.1 U1.A8 | length 2.2
  Top Layer 1 w0.203: v1(134.259,83.435) 134.624,83.071 U1.A8@134.624,81.337
NetR62_1: R62.1 U1.A5 | length 2.6
  Top Layer 1 w0.203: U1.A5@132.224,81.337 132.224,82.821 132.862,83.459 133.03,83.459 133.066,83.458 v1(133.076,83.449)
NetR69_1: R69.1 USB1.4 | length 2.9
  Top Layer 1 w0.102: USB1.4@61,55.605 62.336,55.605 62.701,55.97 62.701,56.726 R69.1@62.92,56.945
NetR72_2: R72.2 USB1.10 | length 2.6
  Top Layer 1 w0.102: USB1.10@61,52.605 62.494,52.605 62.75,52.349 62.75,51.723 R72.2@62.695,51.668
NetR76_2: R76.2 R77.1 | length 1
  Top Layer 1 w0.102: R77.1@124.892,53.801 124.9,53.808 R76.2@124.9,54.811
NetR79_2: R79.2 R80.1 | length 1
  Top Layer 1 w0.102: R80.1@127.771,53.808 127.79,53.828 R79.2@127.79,54.824
NetR83_2: R83.2 U33.3 | length 1.4
  Bottom Layer 1 w0.102: U33.3@127.571,48.369 128.893,48.369 R83.2@128.962,48.438
NetR84_1: R84.1 USB3.4 | length 3.8
  Top Layer 1 w0.102: R84.1@138.407,50.857 139.643,50.857 139.981,50.519 USB3.4@139.981,48.449
NetR85_2: R85.2 USB3.10 | length 3.8
  Top Layer 1 w0.102: USB3.10@142.981,48.449 142.981,50.144 143.694,50.857 R85.2@144.753,50.857
NetR97_1: R97.1 U2.1F3 | length 14.4
  Top Layer 1 w0.102: v1(117.843,74.931) 117.786,74.988 117.786,75.186 117.111,75.861 117.111,76.078 117.264,76.232 117.533,76.232 117.795,75.97 U2.1F3@118.292,75.97 U2.1F3@118.296,75.968
  Bottom Layer 1 w0.102: v1(117.843,74.931) 117.859,74.931 118.876,75.949 118.876,76.205 118.992,76.32 118.992,76.635 118.858,76.769 118.858,77.084 119.126,77.352 119.126,78.867 122.301,82.042 122.301,83.303 R97.1@121.425,84.179
NetR103_2: R103.2 SW1.1 SW1.2 U35.2 | length 7.8
  Top Layer 1 w0.102: SW1.1@149.259,76.22 SW1.2@149.259,80.72 149.225,80.754 149.225,81.661 149.737,82.173 R103.2@149.737,82.668 150.825,82.668 U35.2@150.858,82.635 U35.2@150.838,82.615
NetR105_1: R105.1 R106.2 SW3.1 SW3.2 U37.2 | length 9.3
  Top Layer 1 w0.102: SW3.1@149.259,87.582 SW3.2@149.259,92.082 149.312,92.135 R106.2@149.312,94.804 149.324,94.792 U37.2@151.324,94.792
NetR118_2: R118.2 U22.9 | length 2
  Top Layer 1 w0.203: U22.9@58.712,69.95 U22.9@58.712,69.95 58.713,71.969 R118.2@58.715,71.971
NetR120_2: R120.2 U22.8 | length 2
  Top Layer 1 w0.203: U22.8@59.712,69.95 U22.8@59.712,69.95 59.713,71.964 R120.2@59.714,71.965
NetU22_4: U22.4 U22.5 | length 1
  Top Layer 1 w0.203: U22.4@60.712,63.95 U22.5@61.712,63.95
PDM_CLK0_M0_PMIC: U2.1A14 U20.19 | length 43.7
  SIG w0.102: v1(82.508,55.745) 82.588,55.745 82.773,55.561 82.893,55.561 83.031,55.423 84.454,55.423 86.004,53.873 v1(95.525,53.873)
  Bottom Layer 1 w0.102: U20.19@82.402,56.327 82.412,56.317 82.412,55.922 82.508,55.826 v1(82.508,55.745) ; v1(95.525,53.873) 95.541,53.889 95.877,53.889 95.928,53.94 97.549,53.94 102.18,58.57 110.831,58.57 112.175,59.913 112.175,62.364 112.543,62.732 112.543,62.917 114.07,64.444 114.07,64.924 114.732,65.585 114.732,66.218 115.23,66.716 115.23,68.1 115.444,68.313 115.444,68.661 v1(115.449,68.666)
PMIC_32KOUT_WIFI: R44.1 R45.2 U12.24 | length 19.3
  SIG w0.102: v1(77.216,71.628) v1(77.216,72.644) 77.216,84.201 77.724,84.709 83.746,84.709 v1(83.752,84.704)
PMIC_INT_L: U2.1R19 U20.7 | length 29.3
  SIG w0.102: v1(84.241,60.263) 84.284,60.263 84.563,60.542 85.376,60.542 86.306,61.471 86.306,61.541 92.016,67.251 94.186,67.251 94.403,67.035 96.232,67.035 96.448,66.818 v1(96.513,66.818)
  Bottom Layer 1 w0.102: U20.7@83.36,60.434 83.99,60.434 84.161,60.263 v1(84.241,60.263) ; v1(96.513,66.818) 96.794,67.098 99.914,67.098 105.807,72.992 106.584,72.992 106.807,72.77 v1(106.86,72.77)
PMIC_SLEEP_H: R58.1 U2.1P19 U20.49 | length 58.8
  SIG w0.102: v1(75.871,61.91) 81.346,61.91 83.585,59.671 84.861,59.671 87.2,62.011 87.2,62.147 91.664,66.611 94.092,66.611 94.238,66.466 96.748,66.466 96.957,66.675 97.028,66.675 97.028,78.105 95.881,79.252 89.462,79.252 89.201,78.991 v1(89.154,78.991)
  Bottom Layer 1 w0.102: v1(75.871,61.91) 75.952,61.91 76.022,61.839 76.54,61.839 U20.49@76.545,61.834 ; v1(97.028,66.746) 99.849,66.746 105.891,72.788 106.448,72.788 106.508,72.729 106.508,72.624 106.807,72.325 107.231,72.325 v1(107.246,72.31)
PWM5_LCD_BL: R33.2 U2.AN37 U14.4 | length 70.1
  Bottom Layer 1 w0.102: U14.4@69.203,105.395 69.36,105.552 R33.2@70.948,105.552 70.963,105.537 71.374,105.537 71.674,105.237 71.674,99.138 72.235,98.577 97.249,98.577 97.274,98.552 102.954,98.552 103.962,97.545 103.962,80.876 104.724,80.113 105.62,80.113 105.695,80.038 105.928,80.038 105.987,80.097 106.653,80.097 106.934,79.816 106.934,78.193 106.338,77.597 105.029,77.597 104.475,77.043 104.475,76.062 104.062,75.649 104.062,73.56 v1(104.119,73.504)
PWM14_M0: U2.1P3 U38.5 | length 40.4
  Top Layer 1 w0.102: U38.5@118.578,110.761 117.729,109.912 117.729,94.107 118.402,93.434 v1(123.62,93.434)
  Bottom Layer 1 w0.102: v1(114.619,79.942) 114.619,81.218 123.62,90.219 v1(123.62,93.434)
PWM15_IR_M0: U2.1P4 U38.6 | length 40.6
  Top Layer 1 w0.102: U38.6@121.118,110.761 118.618,108.261 118.618,94.891 119.046,94.463 v1(123.105,94.463)
  Bottom Layer 1 w0.102: v1(114.159,79.185) 114.159,81.266 123.105,90.212 v1(123.105,94.463)
PWRON_KEY: C91.1 R104.1 U20.52 | length 114
  Top Layer 1 w0.102: v1(96.609,87.894) v1(110.165,87.894)
  SIG w0.102: v1(76.549,64.863) 76.552,64.866 76.552,84.807 77.216,85.471 84.328,85.471 85.344,84.455 93.17,84.455 v1(96.609,87.894) ; v1(110.165,87.894) 148.834,87.894 151.13,85.598 151.13,76.835 149.228,74.933 v1(149.228,71.678)
  Bottom Layer 1 w0.203: v1(76.549,64.863) 76.552,64.86 76.552,63.984 U20.52@77.126,63.41
RESETN: C70.1 C231.2 R46.1 R102.2 R103.1 U2.AG38 U20.67 | length 92.4
  SIG w0.102: v1(87.001,68.8) 95.157,68.8 95.524,68.433 95.524,68.273 95.573,68.224 95.573,68.076 v1(95.631,68.019) ; v1(105.274,71.424) 105.274,72.254 107.445,74.425 107.445,74.699 107.645,74.899 107.645,77.43 110.272,80.058 110.272,81.026 109.395,81.903 109.395,86.281 110.236,87.122 142.24,87.122 145.817,83.545 v1@149.747,83.545
  SIG w0.203: v1(95.631,68.019) 95.668,67.982 95.668,67.805 95.746,67.728
  Bottom Layer 1 w0.102: v1(95.631,68.019) 95.631,67.95 95.928,67.652 95.928,66.864 96.399,66.394 100.303,66.394 104.859,70.95 R102.2@105.435,70.95 105.274,71.111 v1(105.274,71.424) 105.331,71.481 105.331,71.642 105.526,71.837 C231.2@105.548,71.837
  Bottom Layer 1 w0.203: U20.67@82.402,63.141 82.402,63.711 82.688,63.997 82.811,63.997 83.1,64.286 83.374,64.286 83.663,63.997 84.825,63.997 86.233,65.405 86.233,67.564 86.36,67.691 86.939,67.691 87.105,67.857 R46.1@87.105,68.727 87.074,68.727 v1(87.001,68.8)
  other v1: 149.737,83.533
RGB_LED_B: LED2.1 U2.1B13 | length 36.3
  SIG w0.102: v1(115.616,69.497) 115.559,69.44 115.559,69.198 115.538,69.177 115.538,69.075 115.801,68.812 115.801,68.451 115.469,68.119 115.469,67.778 115.494,67.753 115.494,67.663 115.509,67.648 115.509,67.32 116.545,66.284 117.145,66.284 118.357,65.072 121.776,65.072 v1(122.185,65.481)
  Bottom Layer 1 w0.102: v1(122.185,65.481) 122.185,65.561 122.386,65.762 122.386,65.784 122.463,65.861 123.496,65.861 125.158,64.198 125.158,60.091 126.661,58.589 141.309,58.589 v1(142.24,57.658)
RGB_LED_G: LED2.3 U2.A26 | length 33.9
  SIG w0.102: v1(116.325,67.29) 116.875,66.74 117.263,66.74 117.907,66.097 122.117,66.097 122.648,65.566 122.907,65.566 v1(122.964,65.509)
  Bottom Layer 1 w0.102: v1(122.964,65.509) 123.807,64.666 124.056,64.666 124.841,63.881 124.841,59.773 126.343,58.271 140.251,58.271 141.245,57.277 143.155,57.277 v1@143.531,57.653
  other v1: 143.51,57.658
RGB_LED_R: LED2.4 U2.B26 | length 38.5
  SIG w0.102: v1(115.821,67.883) 115.862,67.843 115.862,67.531 115.927,67.466 115.927,67.19 116.58,66.537 117.179,66.537 118.365,65.351 119.595,65.351 119.656,65.412 120.986,65.412 121.058,65.484 121.058,65.498 121.224,65.664 v1(121.224,65.744)
  Bottom Layer 1 w0.102: v1(121.224,65.744) 121.304,65.744 121.416,65.633 121.438,65.633 122.005,65.066 123.021,65.066 124.333,63.754 124.333,59.563 125.984,57.912 139.882,57.912 140.898,56.896 143.891,56.896 144.399,57.404 144.399,58.166 143.673,58.892 v1(143.514,58.892)
RX: H1.3 R68.2 U43.2 | length 3.2
  Top Layer 1 w0.102: R68.2@141.322,107.688 141.322,108.64 U43.2@141.317,108.645 141.379,108.707 141.379,110.667 H1.3@141.502,110.791
SARADC_VIN0: C236.1 R105.2 U2.1D17 | length 74
  SIG w0.102: v1(112.761,68.569) 112.806,68.614 114.237,68.614 114.329,68.523 114.329,68.057 114.297,68.026 114.297,67.164 115.84,65.621 115.84,65.164 116.842,64.162 118.594,64.162 118.6,64.168 121.947,64.168 122.038,64.259 126.263,64.259 126.678,63.844 126.678,62.858 v1(126.657,62.837)
  Bottom Layer 1 w0.102: v1(126.657,62.837) 127.899,61.595 141.478,61.595 144.145,64.262 144.145,94.234 145.542,95.631 v1@150.368,95.631
  other v1: 128.875,61.48 150.334,95.649
SDMMC0_CLK: R10.2 U7.5 U8.2 | length 70.8
  Top Layer 1 w0.102: U7.5@80.446,99.743 80.446,98.92 81.02,98.346 U8.2@81.02,97.987 80.996,97.963 80.514,97.963 80.387,97.836 80.387,96.058 80.641,95.804 83.287,95.804 v1(83.316,95.833) ; v1(107.648,65.758) 107.973,65.758 R10.2@108.004,65.789
  SIG w0.102: v1(83.316,95.833) 79.49,95.833 79.173,95.516 79.173,94.596 79.517,94.252 95.486,94.252 97.395,92.343 97.395,65.526 99.04,63.881 105.097,63.881 107.039,65.823 107.245,65.823 107.296,65.772 107.634,65.772 v1(107.648,65.758)
SDMMC0_CMD: R5.1 U2.1E19 | length 72
  Top Layer 1 w0.102: U2.1E19@111.401,68.154 111.409,68.162 111.409,68.369 v1(111.419,68.379)
  SIG w0.102: v1(79.371,97.074) 78.944,96.647 77.724,96.647 77.47,96.901 77.47,97.663 77.746,97.939 94.212,97.939 98.208,93.943 98.208,66.303 99.234,65.278 104.703,65.278 106.933,67.508 106.933,69.649 108.184,70.899 109.635,70.899 110.178,70.356 110.178,69.757 111.156,68.78 111.156,68.734 111.177,68.713 111.177,68.636 111.419,68.394 v1(111.419,68.379)
SDMMC0_D0: R1.1 U2.1E20 | length 63
  Top Layer 1 w0.102: U2.1E20@110.942,67.695 110.94,67.696 110.94,68.123 v1(110.942,68.125)
  SIG w0.102: v1(83.611,96.906) 84.077,96.44 85.264,96.44 85.728,96.904 94.104,96.904 97.802,93.206 97.802,65.774 98.933,64.643 104.902,64.643 107.395,67.136 107.395,69.536 108.352,70.493 109.467,70.493 109.772,70.188 109.772,69.589 110.218,69.142 110.218,68.72 110.679,68.26 110.726,68.26 110.862,68.125 v1(110.942,68.125)
SDMMC0_D1: R2.1 U2.1F19 | length 64.5
  SIG w0.102: v1(86.148,97.278) 85.721,97.278 85.217,96.774 84.328,96.774 83.881,97.221 83.881,97.305 84.239,97.663 86.868,97.663 87.249,97.282 94.361,97.282 98.005,93.638 98.005,66.079 99.06,65.024 104.892,65.024 107.192,67.323 107.192,69.62 108.268,70.696 109.551,70.696 109.975,70.272 109.975,69.673 110.422,69.227 110.422,69.062 110.825,68.659 v1(110.825,68.612)
SDMMC0_D2: R3.1 U2.1D20 | length 73.1
  Top Layer 1 w0.102: v1(111.386,67.285) 111.401,67.27 U2.1D20@111.401,67.235
  SIG w0.102: v1(73.783,97.074) 74.647,96.209 94.291,96.209 97.599,92.901 97.599,65.69 99.027,64.262 104.991,64.262 107.667,66.938 107.667,69.52 108.436,70.29 109.383,70.29 109.569,70.104 109.569,69.5 109.658,69.411 109.658,69.302 110.015,68.945 110.015,68.596 110.59,68.021 110.59,67.979 110.92,67.649 111.023,67.649 v1(111.386,67.285)
SDMMC0_D3: R4.1 U2.1F18 | length 72.3
  SIG w0.102: v1(76.086,97.163) 75.561,97.163 75.323,97.4 75.323,98.023 75.611,98.31 94.349,98.31 98.411,94.248 98.411,68.186 98.533,68.065 98.533,67.825 98.552,67.805 98.552,66.421 99.441,65.532 104.415,65.532 106.637,67.754 106.637,69.64 108.1,71.103 109.719,71.103 110.382,70.44 110.382,69.842 110.837,69.386 110.99,69.386 v1(111.502,68.874)
SDMMC0_DET_L: R6.1 U2.AF37 | length 43.5
  Top Layer 1 w0.102: R6.1@88.315,97.155 88.773,97.155 88.936,97.318 v1(88.936,98.93) ; v1(100.047,73.644) 100.833,72.858 101.076,72.858 102.481,71.453 102.481,71.07 102.906,70.644 105.601,70.644 106.027,71.071 U2.AF37@106.027,71.442
  SIG w0.102: v1(88.936,98.93) 89.017,98.93 89.081,98.866 94.555,98.866 98.615,94.806 98.615,77.061 100.064,75.611 100.064,73.661 v1(100.047,73.644)
SDMMC1_CLK: R8.2 U12.17 | length 67.1
  Top Layer 1 w0.102: U12.17@77.23,82.404 77.216,82.391 77.216,80.518 78.561,79.173 85.904,79.173 88.031,81.3 88.031,83.84 88.687,84.496 v1(88.687,86.353)
  Bottom Layer 1 w0.102: v1(88.687,86.353) 88.768,86.353 88.937,86.523 92.992,86.523 94.774,84.741 94.774,79.011 91.293,75.53 91.293,67.218 95.69,62.821 105.461,62.821 105.831,63.192 107.271,63.192 107.462,63.383 v1(110.971,63.383)
SDMMC1_CMD: U2.B35 U12.16 | length 72.4
  Top Layer 1 w0.102: U12.16@76.341,82.404 76.327,82.391 76.327,80.264 77.742,78.849 86.215,78.849 88.303,80.937 88.303,83.477 89.101,84.275 v1(89.101,84.906) ; U2.B35@113.378,65.222 113.378,65.254 113.235,65.396 113.235,65.737 113.576,66.078 v1(113.652,66.078)
  Bottom Layer 1 w0.102: v1(89.101,84.906) 89.108,84.9 89.492,84.9 89.551,84.841 91.722,84.841 93.758,82.806 93.758,79.652 90.277,76.172 90.277,66.432 95.013,61.696 110.412,61.696 111.115,62.399 111.347,62.399 111.933,62.985 111.933,63.169 113.279,64.515 113.279,65.346 113.235,65.39 113.235,65.726 113.587,66.078 v1(113.652,66.078)
SDMMC1_D0: U2.1C19 U12.18 | length 69
  Top Layer 1 w0.102: U12.18@78.119,82.404 78.105,82.391 78.105,80.645 79.198,79.552 85.648,79.552 87.786,81.69 87.786,84.357 88.335,84.906 v1(88.335,88.041)
  Bottom Layer 1 w0.102: v1(88.335,88.041) 88.365,88.01 93.495,88.01 95.993,85.513 95.993,78.238 92.862,75.108 92.862,67.64 95.834,64.668 108.737,64.668 108.839,64.77 108.872,64.77 109.761,65.659 110.358,65.659 110.914,66.215 110.914,66.263 111.202,66.551 111.438,66.551 111.942,67.055 112.106,67.055 112.286,67.235 v1(112.321,67.235)
SDMMC1_D1: U2.1E18 U12.19 | length 68.8
  Top Layer 1 w0.102: U12.19@79.033,82.404 79.033,80.86 80.002,79.891 85.606,79.891 87.467,81.752 87.467,84.673 87.757,84.963 87.757,86.979 87.722,87.014 v1(87.722,89.071)
  Bottom Layer 1 w0.102: v1(87.722,89.071) 87.723,89.07 93.477,89.07 96.602,85.945 96.602,77.806 93.472,74.676 93.472,68.199 96.287,65.384 108.439,65.384 110.804,67.749 111.065,67.749 111.343,68.027 111.565,68.027 111.626,68.088 111.631,68.088 111.983,68.44 v1(111.987,68.44)
SDMMC1_D2: U2.1D18 U12.14 | length 75.6
  Top Layer 1 w0.102: U12.14@74.537,82.404 74.537,79.641 75.885,78.293 86.802,78.293 88.816,80.307 88.816,83.009 90.049,84.242 90.049,86.797 89.97,86.876 v1(89.97,88.706)
  Bottom Layer 1 w0.102: v1(89.97,88.706) 89.979,88.715 93.473,88.715 96.399,85.789 96.399,77.962 93.269,74.832 93.269,68.021 96.139,65.151 108.508,65.151 110.902,67.546 111.149,67.546 111.427,67.824 111.649,67.824 111.711,67.885 111.715,67.885 111.918,68.088 112.341,68.088 v1(112.368,68.114)
SDMMC1_D3: U2.1A20 U12.15 | length 72.2
  Top Layer 1 w0.102: U12.15@75.426,82.404 75.438,82.392 75.438,79.883 76.797,78.524 86.398,78.524 88.58,80.706 88.58,83.279 89.697,84.396 v1(89.697,85.194)
  Bottom Layer 1 w0.102: v1(89.697,85.194) 91.971,85.194 93.961,83.204 93.961,79.568 90.481,76.088 90.481,66.647 95.151,61.977 110.406,61.977 111.03,62.602 111.263,62.602 111.73,63.069 111.73,63.253 113.076,64.599 113.076,65.24 113.032,65.283 113.032,65.387 112.979,65.44 112.979,65.49 112.94,65.53 112.94,65.814 v1(112.883,65.871)
SPI3_CLK_M1: U2.1U7 U39.6 | length 43.8
  Top Layer 1 w0.102: U2.1U7@111.424,79.208 111.401,79.185 v1(111.819,79.185) ; v1(122.444,95.232) 119.652,95.232 119.253,95.631 119.253,105.918 120.904,107.569 123.063,107.569 123.724,108.23 U39.6@123.724,110.761
  Bottom Layer 1 w0.102: v1(111.819,79.185) 112.264,78.74 113.03,78.74 113.695,79.405 113.695,81.226 122.444,89.975 v1(122.444,95.232)
SPI3_CS0_M1: U2.1T6 U39.3 | length 44.3
  Top Layer 1 w0.102: v1(121.79,96.509) 121.79,103.502 123.19,104.902 130.556,104.902 131.344,105.69 U39.3@131.344,110.761
  Bottom Layer 1 w0.102: v1(112.321,79.185) 112.967,79.185 113.117,79.335 113.117,79.832 112.96,79.989 112.96,80.22 113.117,80.377 113.117,80.936 121.79,89.609 v1(121.79,96.509)
SPI3_MISO_M1: U2.1U6 U39.4 | length 41.5
  Top Layer 1 w0.102: v1(120.65,96.031) 120.65,104.14 122.174,105.664 127.635,105.664 128.804,106.833 U39.4@128.804,110.761
  Bottom Layer 1 w0.102: v1(111.871,79.692) 111.903,79.724 111.903,80.044 112.241,80.382 112.241,81.343 113.111,82.213 113.478,82.213 120.65,89.385 v1(120.65,96.031)